# Altium PCB PCB.PcbDoc
Units mm, origin at the board's own origin, x right, y up, seen from the top; angles counter-clockwise.
Board outline 56.2 x 65 mm, 2 copper layers (Top Layer, Bottom Layer); 45 components, 44 nets, 166 pads, 48 vias.
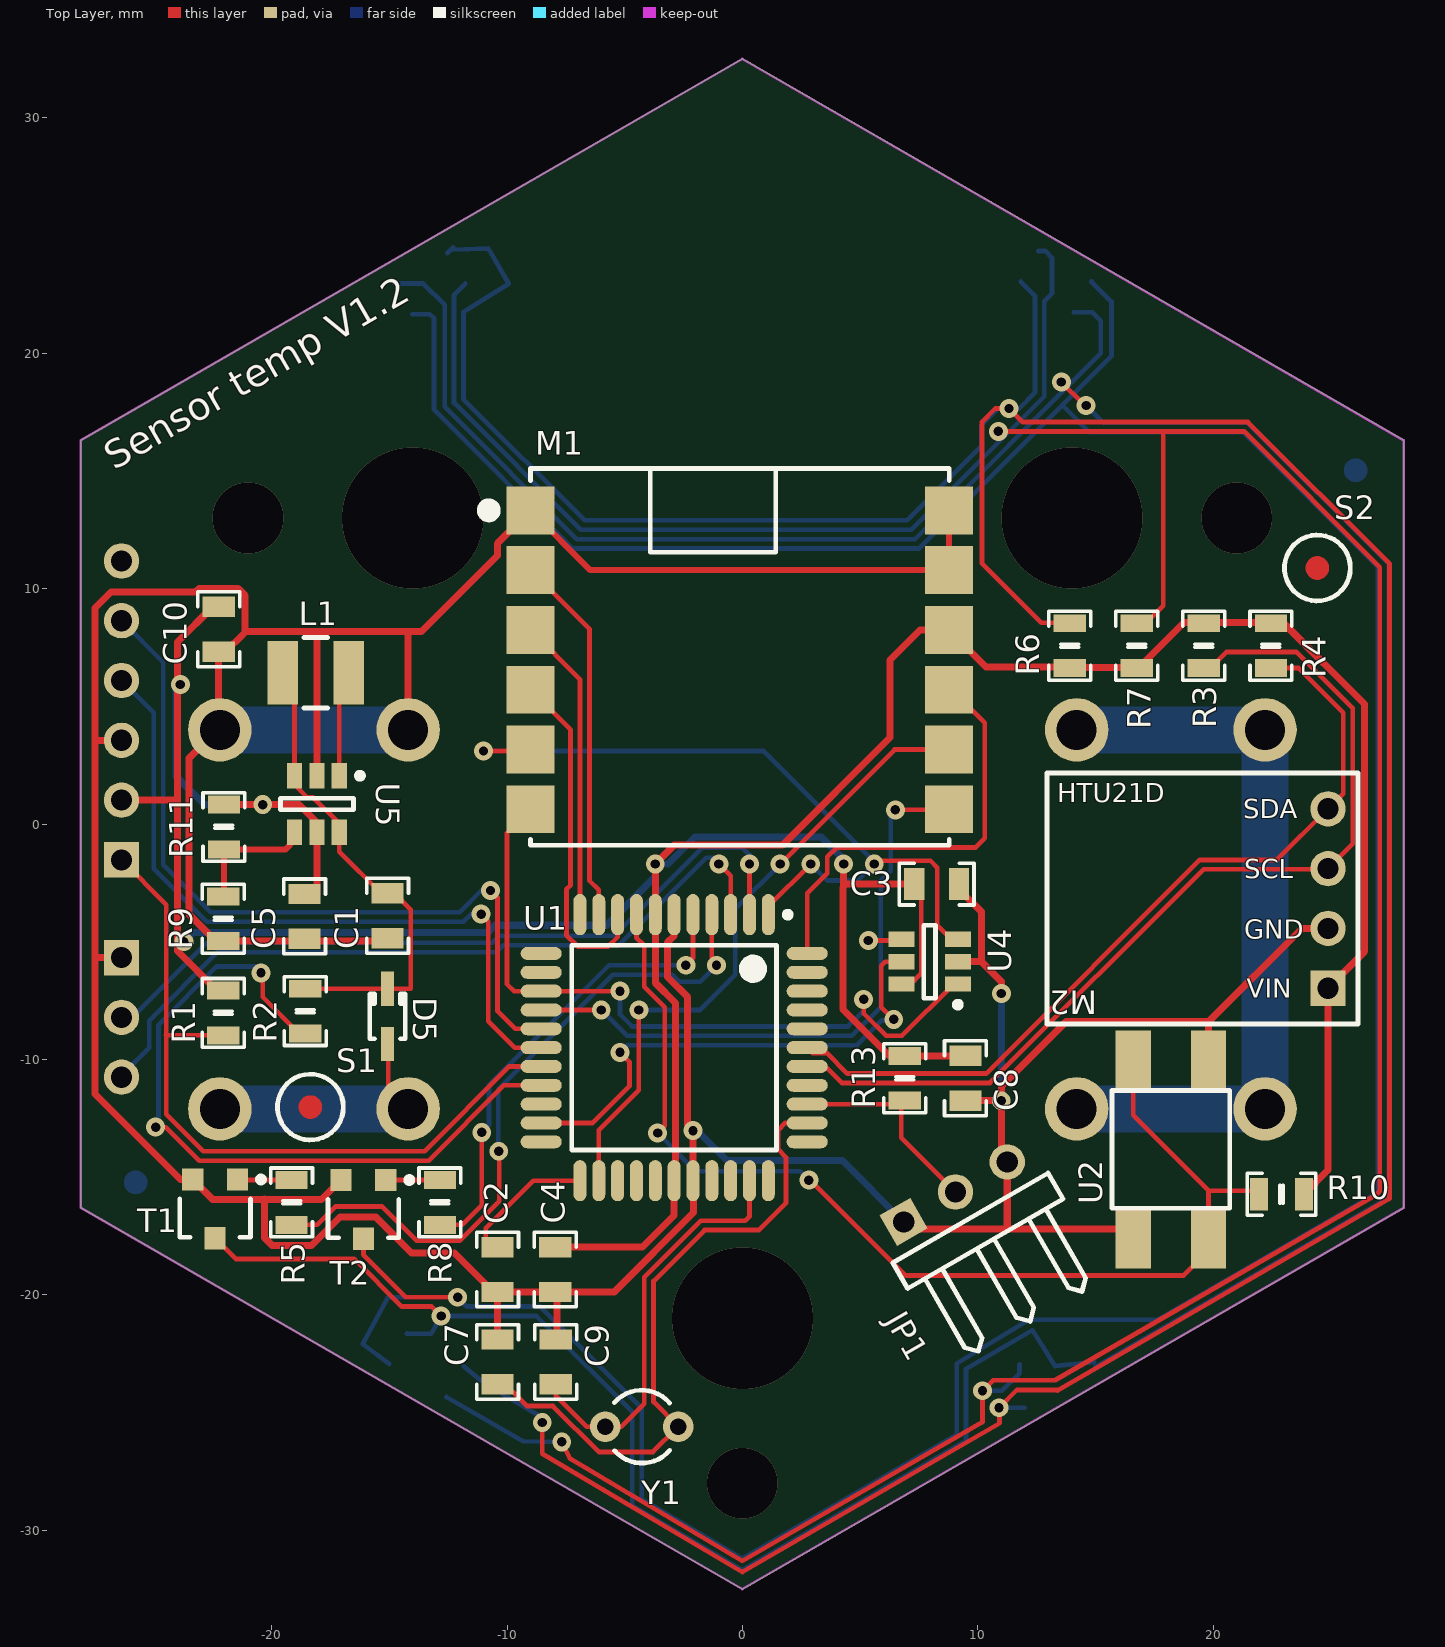
[diagram p0: Top Layer view]
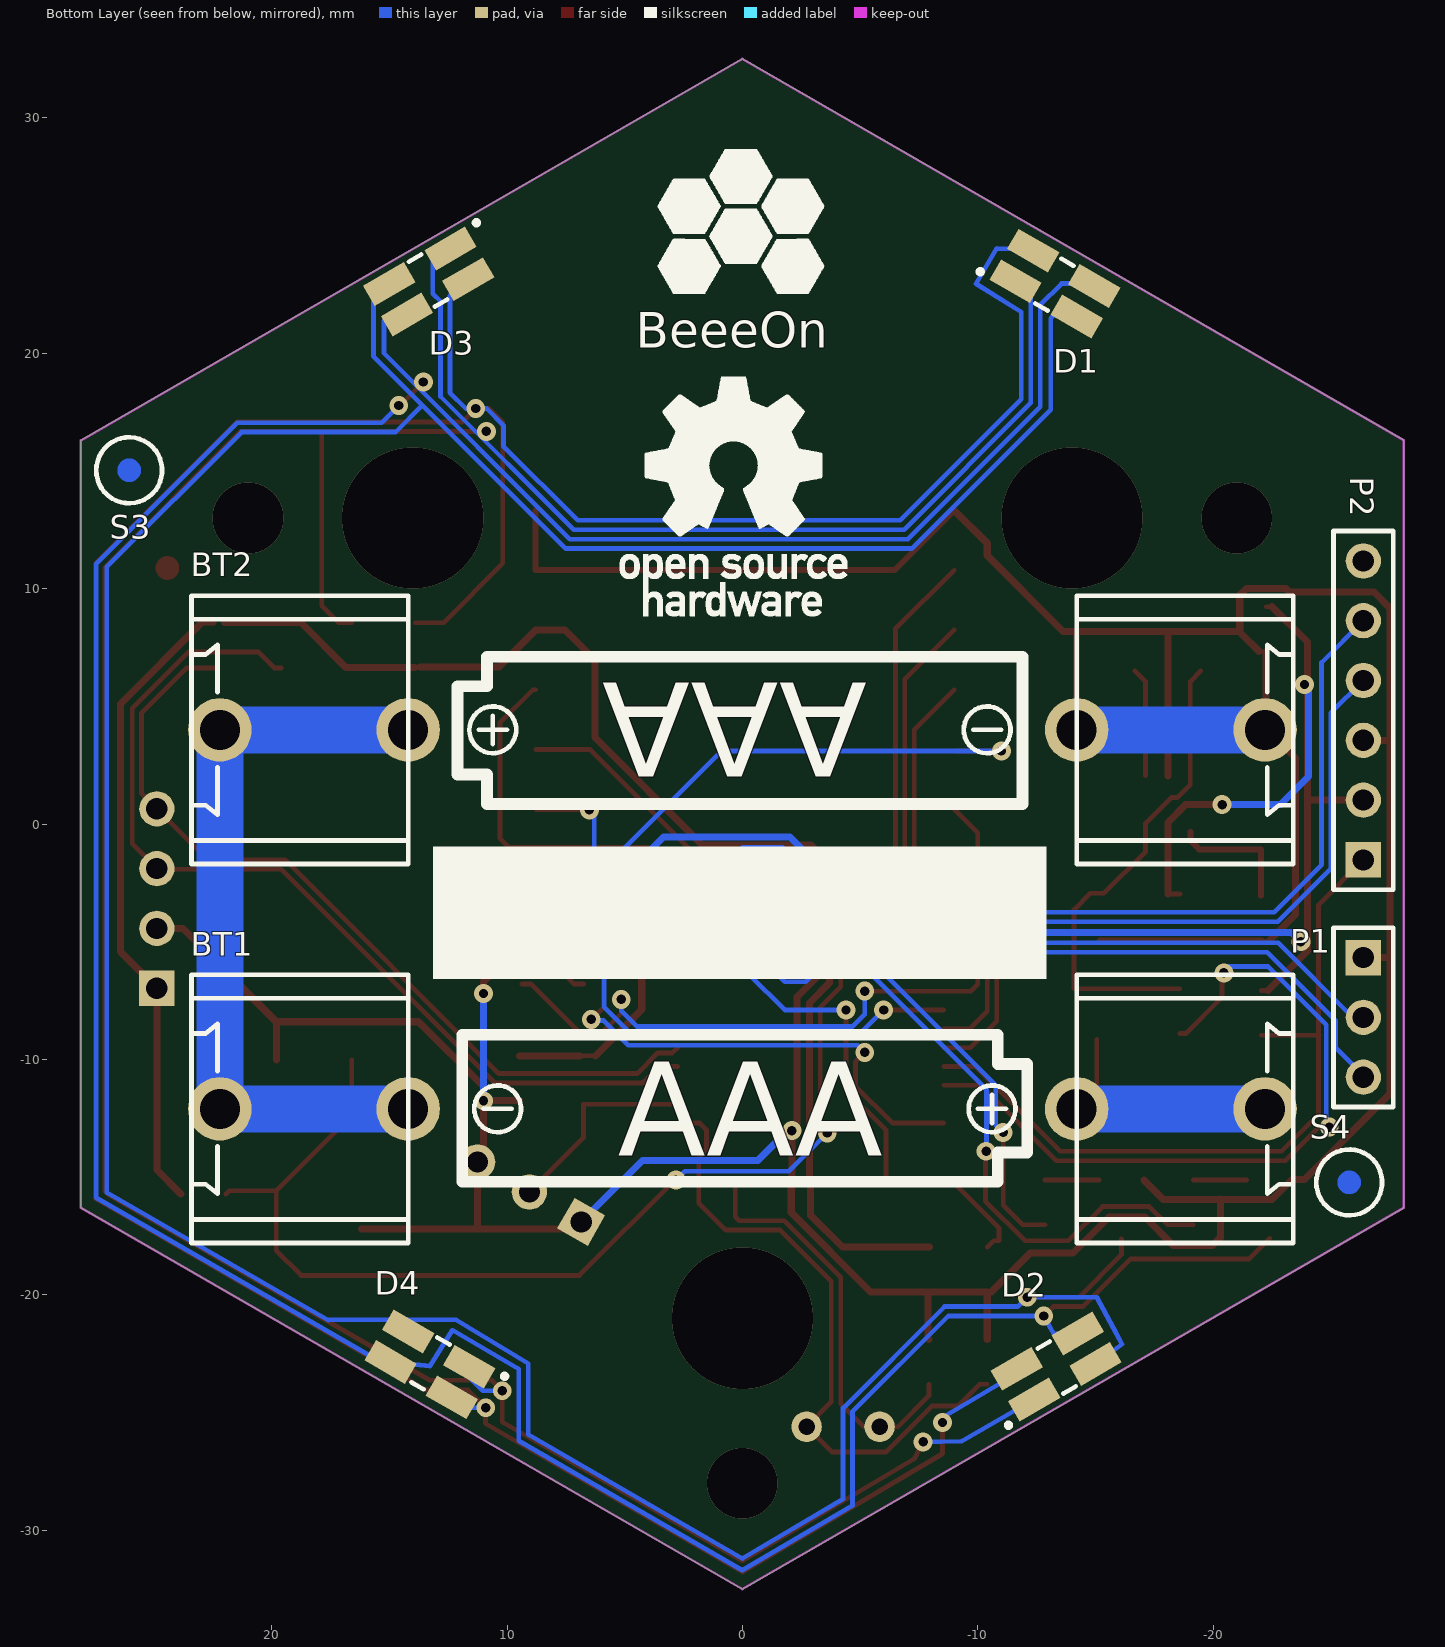
[diagram p1: Bottom Layer view, seen from below]

## Layer stack, top to bottom
Top Layer: signal copper 0.0356
Dielectric: dielectric 0.32, FR-4, Dk 4.8
Bottom Layer: signal copper 0.0356

## Board outline
-28.1,16.3 0,32.5 28.1,16.3 28.1,-16.3 0,-32.5 -28.1,-16.3

## Design rules (kind name [scope] priority, off if disabled: settings)
Clearance [All] p1: gap=0.2
HoleSize [All] p1: absolutevalues=TRUE maxlimit=10 minlimit=0.2 maxpercent=80.000 minpercent=20.000
MinimumSolderMaskSliver [All] p1: minsoldermaskwidth=0.01
PolygonConnect [All] p1: connectstyle=Direct reliefconductorwidth=0.254 reliefentries=4 polygonreliefangle="90 Angle"
RoomDefinition sensor [InComponentClass('sensor')] p1 off: confinementstyle=ConfineIn formatcopy=TRUE lockcomponents=FALSE outline 28.25,25.394 39.453,25.394 39.453,34.325 28.25,34.325
RoutingVias [All] p1: holewidth=0.4 width=0.8 viastyle="Through Hole" minholewidth=0.4 minwidth=0.8 maxholewidth=2 maxwidth=1.5
SilkToSilkClearance [All] p1: silktosilkclearance=0.01
SilkscreenOverComponentPads [All] p1: minsilkscreentomaskgap=0.01
SolderMaskExpansion [All] p1: expansion=0.102
Width [All] p1: maxlimit=2 minlimit=0.2 preferedwidth=0.2
24 further rules are at their usual default settings.

## Components (designator, comment, footprint, x,y, rotation, side; value= is the part's Value field where it differs from the comment)
BT1 "Battery" BATT_HOLDER-AAA 0,-12.1 r180 bottom locked
BT2 "Battery" BATT_HOLDER-AAA 0,4 r0 bottom locked
C1 "100nF" C0805 -15.075,-3.9 r90 top
C2 "10uF" C0805 -10.4,-18.925 r270 top
C3 "100nF" C0805 8.25,-2.55 r180 top
C4 "100nF" C0805 -7.95,-18.925 r270 top
C5 "10uF" C0805 -18.6,-3.925 r270 top
C7 "8pF" C0805 -10.4,-22.85 r90 top
C8 "100nF" C0805 9.475,-10.8 r90 top
C9 "8pF" C0805 -7.925,-22.85 r90 top
C10 "100nF" C0805 -22.25,8.275 r270 top
D1 "LED" "LED MULTI2" -13.3,23 r30 bottom
D2 "LED" "LED MULTI2" -13.3,-23 r330 bottom locked
D3 "LED" "LED MULTI2" 13.3,23 r150 bottom locked
D4 "LED" "LED MULTI2" 13.3,-23 r210 bottom locked
D5 "BAT46" SOD-323 -15.075,-8.175 r90 top
JP1 "EXT" HDR1X3H 6.85,-16.9 r30 top locked
L1 "Inductor" IND3X3 -18.125,6.425 r180 top
M1 "MRF89XAM8A" MRF89XAM8A -9,-0.9 r0 top locked
M2 "HTU21D Module" HTU21D 24.875,-6.975 r180 top locked
P1 "DBG_UART" HDR1X3 -26.375,-5.675 r270 bottom
P2 "ISP PROG" HDR1X6 -26.375,-1.525 r90 bottom
R1 "4k7" R0805 -22.05,-8.025 r90 top
R2 "4k7" R0805 -18.575,-7.95 r270 top
R3 "4k7" R0805 19.6,7.575 r90 top
R4 "4k7" R0805 22.45,7.575 r90 top
R5 "4k7" R0805 -19.15,-16.075 r90 top
R6 "330" R0805 13.9,7.575 r90 top
R7 "330" R0805 16.75,7.575 r90 top
R8 "4k7" R0805 -12.85,-16.075 r90 top
R9 "562k" R0805 -22.05,-4.025 r270 top
R10 "10k" R0805 22.9,-15.725 r180 top
R11 "976k" R0805 -22.025,-0.125 r270 top
R13 "1k" R0805 6.9,-10.8 r270 top
S1 "TARGET" TARGET -18.35,-12.025 r0 top
S2 "TARGET" TARGET 24.425,10.875 r0 top
S3 "TARGET" TARGET 26.05,15.025 r180 bottom
S4 "TARGET" TARGET -25.775,-15.225 r180 bottom
T1 "BC847C" SOT23 -22.4,-16.35 r180 top
T2 "BC847C" SOT23 -16.1,-16.375 r180 top
U1 "PIC18F46J50-I/PT" TQFP-PT44_N -2.9,-9.5 r270 top locked
U2 "Vibra sensor 5x5" "VIBRATION_SENSOR 5X5" 18.2,-13.825 r90 top
U4 "25LC040AT-I/OT" SOT-23-OT6_N 7.95,-5.85 r180 top
U5 "MCP1640" SOT-23-OT6_N -18.075,0.85 r270 top
Y1 "32.768KHz" R38 -4.275,-25.6 r90 top

## Footprints (in the part's own frame and the unit in brackets; to place one, negate y for a bottom-side part, rotate by r counter-clockwise, add the part's x,y. Pads: shape width x height; smd on the part's side, far side on the other; paste and mask are expansions set on the pad)
BATT_HOLDER-AAA [mm] "Contact holder BC-0402 GME 819-134"
  round 2.7 hole 1.7: 1(14.2,0) 1(22.2,0) 2(-22.2,0) 2(-14.2,0)
  silkscreen extent -23.4,-5.7 23.4,5.7
C0805 [mil] "Capacitor SMD 0805; 2.0 x 1.2 mm"
  rect 34x54 smd: 1(-37.5,0) 2(37.5,0)
  silkscreen extent -62,-35 62,35, body extent -39,-24 43,24, height 69
HDR1X3 [mm] "Connector; Header; 3 Position"
  rect 1.5x1.5 hole 0.9: 1(0,0)
  round 1.5 hole 0.9: 2(2.54,0) 3(5.08,0)
  silkscreen extent -1.27,-1.27 6.35,1.27
HDR1X3H [mm] "Connector; Header; 3 Position; Right Angle"
  rect 1.5x1.5 hole 0.9: 1(0,0)
  round 1.5 hole 0.9: 2(2.54,0) 3(5.08,0)
  silkscreen extent -1.27,-6.35 6.35,-1.27
HDR1X6 [mm] "Connector; Header; 6 Position"
  rect 1.5x1.5 hole 0.9: 1(0,0)
  round 1.5 hole 0.9: 2(2.54,0) 3(5.08,0) 4(7.62,0) 5(10.16,0) 6(12.7,0)
  silkscreen extent -1.27,-1.27 13.97,1.27
HTU21D [mm]
  rect 1.5x1.5 hole 0.9: 1(0,0)
  round 1.5 hole 0.9: 2(0,-2.54) 3(0,-5.08) 4(0,-7.62)
  silkscreen extent -1.27,-9.14 11.94,1.52, body extent -1.02,-8.64 1.02,1.02, height 2.5
IND3X3 [mm] "TYS30104R7M-10"
  rect 1.3x2.7 smd: 1(-1.4,0) 2(1.4,0)
  silkscreen extent -0.5,-1.5 0.5,1.5
"LED MULTI2" [mm] "3.0mmx2.5mm SMT LED, 1.4mm thickness."
  rect 2x1 smd: 1(1.5,0.8) 2(-1.5,0.8) 3(1.5,-0.7) 4(-1.5,-0.7)
  silkscreen extent -0.3,-1 3.1,1.3
MRF89XAM8A [mil] "868MHz Ultra-Low Power  Sub-GHz Transceiver Module"
  rect 80x80 smd: 1(0,560) 2(0,460) 3(0,360) 4(0,260) 5(0,160) 6(0,60) 7(700,60) 8(700,160) 9(700,260) 10(700,360) 11(700,460) 12(700,560)
  silkscreen extent -80,0 700,630, body extent 0,0 700,1100, height 5
R38 [mm] "Crystal, Thru-Hole; 2 Leads; Body 3.1 x 8.2 mm (Dia.xH)"
  round 1.3 hole 0.7: 1(0,1.55) 2(0,-1.55)
  silkscreen extent -1.55,-1.19 1.55,1.17
R0805 [mil] "Resistor SMD 0805; 2.0 x 1.2 mm"
  rect 30x54 smd: 1(-37.5,0) 2(37.5,0)
  silkscreen extent -58,-35 58,35, body extent -39,-24 43,24, height 69
SOD-323 [mm] "SOD-323/SC-76; 2 Leads; Body 1.7 x 1.3 mm, (LxW)"
  rect 1.45x0.55 smd: 1(1.175,0) 2(-1.175,0)
  silkscreen extent -0.95,-0.75 0.95,0.75, body extent -0.85,-0.65 0.85,0.65, height 0.9
SOT23 [mm] "SOT23; 3 Leads; Body 3.0 x 1.3 mm"
  rect 0.9x0.95 smd: 1(-0.95,-1.25) 2(0.95,-1.25) 3(0,1.25)
  silkscreen extent -2.08,-1.37 1.5,1.2, body extent -1.5,-0.7 1.5,0.7, height 1.75
SOT-23-OT6_N [mm] "SOT23, 6-Leads, Body 2.9x1.6mm, Pitch 0.95mm, Lead Span 2.7mm, IPC Medium Density"
  rect 1.1x0.65 smd: 1(-1.2,0.95) 2(-1.2,0) 3(-1.2,-0.95) 4(1.2,-0.95) 5(1.2,0) 6(1.2,0.95)
  silkscreen extent -1.33,-1.55 0.25,1.95, body extent -0.9,-1.55 0.9,1.55, height 1.45
TARGET [mm]
  Top Layer circle w0.6: c0,0 r0.2
  silkscreen extent -1.4,-1.4 1.4,1.4
TQFP-PT44_N [mm] "Thin QFP, 44-Leads, Body 10x10mm, Pitch 0.8mm, IPC Medium Density"
  oval 1.75x0.55 smd: 1(-5.65,4) 2(-5.65,3.2) 3(-5.65,2.4) 4(-5.65,1.6) 5(-5.65,0.8) 6(-5.65,0) 7(-5.65,-0.8) 8(-5.65,-1.6) 9(-5.65,-2.4) 10(-5.65,-3.2) 11(-5.65,-4) 23(5.65,-4) 24(5.65,-3.2) 25(5.65,-2.4) 26(5.65,-1.6) 27(5.65,-0.8) 28(5.65,0) 29(5.65,0.8) 30(5.65,1.6) 31(5.65,2.4) 32(5.65,3.2) 33(5.65,4)
  oval 0.55x1.75 smd: 12(-4,-5.65) 13(-3.2,-5.65) 14(-2.4,-5.65) 15(-1.6,-5.65) 16(-0.8,-5.65) 17(0,-5.65) 18(0.8,-5.65) 19(1.6,-5.65) 20(2.4,-5.65) 21(3.2,-5.65) 22(4,-5.65) 34(4,5.65) 35(3.2,5.65) 36(2.4,5.65) 37(1.6,5.65) 38(0.8,5.65) 39(0,5.65) 40(-0.8,5.65) 41(-1.6,5.65) 42(-2.4,5.65) 43(-3.2,5.65) 44(-4,5.65)
  silkscreen extent -5.77,-4.35 4.35,4.95, body extent -5,-5 5,5, height 1.2
"VIBRATION_SENSOR 5X5" [mm] "VIBRATION_SENSOR 5x5"
  rect 2.5x1.5 smd: 1(-3.8,1.6) 2(-3.8,-1.6) 3(3.8,1.6) 4(3.8,-1.6)
  silkscreen extent -2.5,-2.5 2.5,2.5

## Part data
BT1 BT2: "Multicell Battery"
C1 C2 C3 C4 C5 C7 C8 C9 C10: library part Cap, "Capacitor"
D1 D2 D3 D4: library part "LED MULT 2 S"
D5: library part Diode, "Default Diode"
JP1: library part "Header 3H", "Header, 3-Pin, Right Angle"
M1: "868 MHz Ultra-Low Power  Sub-GHz Transceiver Module"
M2: library part HTU21D_MODULE, "Digital Barometric Pressure Sensor Module"
P1: library part "Header 3", "Header, 3-Pin"
P2: library part "Header 6", "Header, 6-Pin"
R1 R2 R3 R4 R5 R6 R7 R8 R9 R10 R11 R13: library part Res2, "Resistor"
T1 T2: library part NPN_BC847C, "NPN General-purpose Transistor"
U1: "Low Power, High Performance USB Microcontroller with nanoWatt XLP Technology, 44-pin TQFP, Industrial Temperature"
U2: library part "Vibra sensor", "Vibration sensor 5x5"
U4: "4K SPI Bus Serial EEPROM, 6-Pin SOT-23, Industrial Temperature, Tape and Reel"
U5: "0.65V Start-up Synchronous Boost Regulator"
Y1: library part XTAL, "Crystal Oscillator"

## Via types
v1: diameter 0.8, hole 0.4, Top Layer to Bottom Layer, tented both sides, 42 vias
v2: diameter 6, hole 6, Top Layer to Bottom Layer, tented both sides, 3 vias
v3: diameter 3, hole 3, Top Layer to Bottom Layer, tented both sides, 3 vias

## Nets (pads, with @x,y where several pads share a name; then routed paths per layer and width w, separated by ;. In a path a pad name is that pad's centre, name@x,y a point inside that pad or via, vN(x,y) a via of type N, cw(c..) or ccw(c..) an arc to the next point about the centre after c; other vN are vias at no path point)
1W-DATA: JP1.2 R13.2 U1.36 | length 8.7
  Top Layer w0.2: U1.36 6.753,-11.9 6.753,-13.333 JP1.2
DHT_EN: U1.30
EE_NCS: U1.21 U4.5 | length 21.6
  Top Layer w0.2: U1.21 -6.366,-12.7 -4.8,-11.134 -4.8,-10.1 v1(-5.2,-9.7) ; v1(6.425,-8.3) 5.9,-7.775 5.9,-6.025 6.075,-5.85 U4.5
  Bottom Layer w0.2: v1(-5.2,-9.7) -4.9,-9.4 4.85,-9.4 5.9,-8.35 v1@6.425,-8.35
GND: BT2.2 C1.1 C2.2 C3.1 C4.2 C5.2 C7.2 C8.1 C9.2 C10.2 JP1.1 JP1.3 M1.1 M1.11 M1.12 M2.2 P1.1 P2.3 R9.2 T1.2 T2.2 U1.6 U1.29 U2.1 U2.4 U4.2 U5.2 | length 217.7
  Top Layer w0.2: R9.2@-22.373,-4.978 R9.2 ; C10.2 C10.2@-21.953,7.322 ; C2.2@-10.573,-19.877 C2.2 ; C4.2 C4.2@-7.875,-19.952 ; U1.29 U1.29@-2.075,-15.125 ; v1@-2.1,-13.35 -1.85,-13.1 -1.925,-13.025 v1(-2.1,-13.025) v1@-1.938,-13.187 ; JP1.1 JP1.1@7.15,-17.2 ; C3.1@9.202,-2.778 C3.1 ; JP1.3@10.997,-14.108 JP1.3
  Top Layer w0.254: M1.1 -6.46,10.784 M1.11 M1.12
  Top Layer w0.3: -27.45,-5.675 P1.1 ; -27.405,3.555 P2.3 ; R9.2@-22.373,-4.978 -23.5,-3.85 -23.5,2.8 -22.25,4.05 C10.2 ; R9.2 C1.1@-15.2,-4.978 ; C10.2@-21.953,7.322 -21.2,8.075 ; -20.3,-15.927 -20.3,-15.95 ; U5.2 -18.075,8.175 ; T2.2 -17.875,-15.95 -20.3,-15.95 ; BT2.2@-14.2,4 -14.2,8.026 ; C2.2@-10.573,-19.877 -12.225,-18.225 -14.05,-18.225 -15.575,-16.7 -17.1,-16.7 -18.3,-17.9 -19.975,-17.9 -20.3,-17.575 -20.3,-15.95 ; C7.2 C2.2 C4.2 -5.445,-19.877 -2.075,-16.507 U1.29@-2.075,-15.125 ; M1.1 -10.4,11.924 -10.4,11.4 -13.625,8.175 -18.075,8.175 ; C9.2 -7.875,-21.848 C4.2@-7.875,-19.952 ; U1.6 -2.9,-4.75 -3.175,-5.025 -3.175,-6.5 -2.325,-7.35 -2.325,-12.8 v1(-2.1,-13.025) ; U1.29 v1@-2.1,-13.35 ; JP1.1@7.15,-17.2 11.249,-17.2 ; U4.2 10.15,-5.85 ; C3.1@9.202,-2.778 10.15,-3.725 10.15,-5.85 ; C8.1 v1(10.997,-11.753) ; JP1.3@10.997,-14.108 v1(10.997,-11.753) ; v1(11,-7.2) 11,-6.7 10.15,-5.85 ; JP1.3 11.249,-17.2 ; U2.1@16.175,-17.2 11.249,-17.2 ; U2.4 19.8,-8.4 ; M2.2 23.765,-4.435 19.8,-8.4 ; -20.3,-15.95 -22.5,-15.95 T1.2 -23.875,-15.1 -27.5,-11.475 -27.5,9.175 -26.825,9.85 -23.24,9.85 -23.081,10.009 -21.419,10.009 -21.125,9.715 -21.125,8.175 -18.075,8.175 ; v1(10.997,-11.753) 10.997,-11.155 13.752,-8.4 19.8,-8.4
  Bottom Layer w0.2: v1(-2.1,-13.025) v1@-1.925,-13.025 ; v1@10.997,-7.203 v1(11,-7.2)
  Bottom Layer w0.3: v1@-1.925,-13.025 -0.65,-14.3 4.25,-14.3 JP1.1 ; v1(10.997,-11.753) v1@10.997,-7.203
  Bottom Layer w2: BT2.2@-22.2,4 BT2.2@-14.2,4
INT0: R10.2 U1.8 U2.2 U2.3 | length 47.9
  Top Layer w0.2: U1.8 -4.5,-4.825 -4.175,-5.15 -4.175,-6.908 -3.3,-7.783 -3.3,-12.826 v1(-3.6,-13.126) ; v1(2.825,-15.125) 2.875,-15.125 6.925,-19.175 18.75,-19.175 19.8,-18.125 U2.2 19.8,-15.575 ; U2.3 16.6,-12.375 19.8,-15.575 ; R10.2 21.797,-15.575 19.8,-15.575
  Bottom Layer w0.2: v1@-3.549,-13.126 v1(-3.6,-13.126) -1.976,-14.75 2.45,-14.75 v1(2.825,-15.125)
LED1: R5.1 U1.4 | length 29.1
  Top Layer w0.2: R5.1 -18.064,-17.027 -17.286,-16.25 -15.3,-16.25 -13.842,-17.708 -12.009,-17.708 -10.325,-16.025 -10.325,-13.925 v1(-10.35,-13.9) ; U1.4 -1.3,-5.8 v1(-1.1,-6)
  Bottom Layer w0.2: v1@-10.367,-13.9 -10.367,-11.266 -5.501,-6.4 -2.99,-6.4 -2.69,-6.7 -2.11,-6.7 -1.8,-6.7 v1(-1.1,-6)
LED2: R8.1 U1.5 | length 20.1
  Top Layer w0.2: R8.1 -11.903,-17.027 -11.076,-16.201 v1(-11.076,-13.099) ; v1(-2.4,-6) -2.1,-5.7 U1.5
  Bottom Layer w0.2: v1(-11.076,-13.099) -10.767,-12.791 -10.767,-11.1 -5.667,-6 v1(-2.4,-6)
LED5: U1.20
LED6: U1.22
MISO1: M1.7 U1.15 U4.4 | length 28.2
  Top Layer w0.2: U1.15 v1(-6,-7.9) ; v1(5.35,-4.95) 6.7,-4.95 U4.4 ; v1(6.5,0.6) M1.7@8.756,0.6
  Bottom Layer w0.2: v1(-6,-7.9) -4.9,-9 4.65,-9 5.875,-7.775 5.875,-4.95 ; v1(5.35,-4.95) 5.875,-4.95 ; v1(6.5,0.6) 6.3,0.4 6.3,-1.99 5.875,-2.415 5.875,-4.95
MOSI1: M1.5 U1.1 U4.3 | length 32.8
  Top Layer w0.2: v1(-11,3.1) M1.5@-9.064,3.1 ; U1.1@1.1,-3.5 v1(2.9,-1.7) ; v1(5.6,-1.7) 5.736,-1.564 7.989,-1.564 8.275,-1.85 8.275,-4.3 8.875,-4.9 U4.3
  Bottom Layer w0.2: v1(-11,3.1) 0.9,3.1 5.6,-1.6 v1(5.6,-1.7) 4.9,-2.4 3.6,-2.4 v1(2.9,-1.7)
MRF_IRQ0: M1.4 U1.9 | length 14.7
  Top Layer w0.2: M1.4 -7.3,4.004 -7.3,-2.6 -7.475,-2.775 -7.475,-4.725 -7,-5.2 -5.7,-5.2 -5.3,-4.8 U1.9
MRF_IRQ1: M1.9 U1.44 | length 18.5
  Top Layer w0.2: U1.44 2.75,-2.95 3.6,-2.1 3.6,-1.4 4,-1 9.9,-1 10.3,-0.6 10.3,4.3 8.896,5.704 M1.9
MRF_NCS: M1.8 U1.24 | length 27.4
  Top Layer w0.2: U1.24 -6.1,-13 -4.4,-11.3 v1(-4.4,-7.9) ; v1(1.6,-1.7) 6.464,3.164 M1.8
  Bottom Layer w0.2: v1(-4.4,-7.9) -1.8,-7.9 -0.3,-6.4 -0.3,-3.6 v1(1.6,-1.7)
MRF_NRESET: M1.2 U1.10 | length 15.8
  Top Layer w0.2: M1.2 -6.5,8.284 -6.5,-2.4 -6.1,-2.8 U1.10
MRF_WAKE: M1.3 U1.11 | length 13
  Top Layer w0.2: M1.3 -6.9,6.144 U1.11
NetBT1_1: BT1.1 D5.2 | length 11.3
  Top Layer w0.2: D5.2@-15.05,-9.15 -15.05,-11.25 BT1.1@-14.2,-12.1
  Bottom Layer w2: BT1.1@-22.2,-12.1 BT1.1@-14.2,-12.1
NetBT1_2: BT1.2 BT2.1 | length 32.1
  Bottom Layer w2: BT1.2@14.2,-12.1 22.2,-12.1 22.2,4 BT2.1@14.2,4
NetC2_1: C2.1 U1.23 | length 6
  Top Layer w0.2: C2.1 -10.672,-17.7 -10.9,-17.7 -10.9,-17.166 -8.884,-15.15 U1.23
NetD1_1: D1.1 D2.1 D3.1 D4.1 R7.2 | length 145
  Top Layer w0.2: v1(-7.675,-26.25) -7.325,-26.95 0,-31.3 10.2,-25.4 v1(10.2,-24.075) 10.632,-23.643 ; 10.644,-23.631 13.279,-23.631 26.925,-15.75 27.075,-15.6 27.075,10.909 21.309,16.675 17.875,16.675 ; v1(10.875,16.675) 17.875,16.675 ; R7.2@16.6,8.553 17.152,8.553 17.875,9.275 17.875,16.675
  Bottom Layer w0.2: D2.1@-12.574,-24.343 -9.3,-26.225 v1(-7.675,-26.25) ; D1.1@-11.774,22.957 -12.25,22.481 -12.25,17.884 -6.866,12.5 7.166,12.5 12.825,18.159 12.825,22.201 13.15,22.526 13.15,24.05 12.857,24.343 D3.1@12.574,24.343 ; v1(10.2,-24.075) 11.025,-24.075 11.774,-23.326 D4.1@11.774,-22.957 ; v1@10.875,16.625 v1(10.875,16.675)
NetD1_2: D1.2 D2.2 D3.2 D4.2 T2.3 | length 149.9
  Top Layer w0.2: T2.3 -16.1,-18.3 -14.3,-20.1 v1(-12.1,-20.1)
  Bottom Layer w0.2: D2.2 -16.125,-22.1 -15.9,-21.675 -15.05,-20.1 v1(-12.1,-20.1) -11.7,-20.5 -8.584,-20.5 -4.275,-24.809 -4.275,-28.675 0,-31.2 9.1,-25.932 9.1,-22.925 12.15,-21.063 17.56,-21.063 ; D1.2@-14.026,21.657 -13.282,21.657 -13.1,21.475 -13.1,17.603 -7.197,11.7 7.497,11.7 15.675,19.878 15.675,22.194 D3.2@14.826,23.043 ; 13.597,17.79 14.737,16.65 21.275,16.65 26.997,10.928 26.997,-15.652 17.573,-21.085
NetD1_3: D1.3 D2.3 D3.3 D4.3 R6.2 | length 150.6
  Top Layer w0.2: v1(-8.5,-25.425) -8.5,-26.75 -0.001,-31.775 10.916,-25.46 v1@10.916,-24.816 ; v1(10.9,-24.8) 11.657,-24.043 13.358,-24.043 ; 13.382,-24.062 27.489,-15.906 27.489,11.061 21.475,17.075 11.9,17.075 v1(11.325,17.65) 10.75,17.65 10.175,17.075 10.175,11.071 12.694,8.553 R6.2@13.9,8.553
  Bottom Layer w0.2: D1.3@-12.524,24.256 D1.3@-12.388,24.393 ; D1.3@-12.354,24.395 D1.3@-12.388,24.393 ; D1.3@-12.28,24.5 D1.3@-12.388,24.393 ; D2.3@-11.824,-23.044 -11.673,-23.17 -10.975,-23.75 -8.575,-25.175 v1(-8.5,-25.425) ; v1(10.9,-24.8) D4.3@11.98,-24.8 ; D3.3@11.824,23.044 12.425,22.443 12.425,18.325 11.75,17.65 v1(11.325,17.65) 10.86,17.65 10.15,16.94 10.15,16.05 7,12.9 -6.7,12.9 -11.85,18.05 -11.85,21.75 -9.925,22.95 -10.725,24.325 -10.8,24.45 -12.352,24.394 D1.3@-12.388,24.393
NetD1_4: D1.4 D2.4 D3.4 D4.4 T1.3 | length 154.5
  Top Layer w0.2: T1.3 -21.525,-18.475 -16.491,-18.475 -14.466,-20.5 -13.2,-20.5 v1(-12.8,-20.9) ; v1(13.551,18.776) 13.551,18.774 14.468,17.857 14.468,17.644 v1(14.601,17.776)
  Bottom Layer w0.2: D1.4@-14.776,22.956 -13.556,22.956 -12.65,22.05 -12.65,17.719 -7.031,12.1 7.331,12.1 15.225,19.994 15.225,21.375 14.856,21.744 D3.4@14.076,21.744 ; D2.4 -13.225,-21.65 -13.15,-21.525 v1(-12.8,-20.9) -8.75,-20.9 -4.675,-24.975 -4.675,-28.95 0,-31.7 9.5,-26.2 9.5,-23.15 12.325,-21.5 13.275,-23.025 D4.4 ; v1(13.551,18.776) v1@13.574,18.776 ; v1(14.601,17.776) 15.327,17.05 21.45,17.05 27.45,11.05 27.45,-15.875 15.05,-23.032 D4.4@14.975,-23.075
NetL1_1: L1.1 U5.1 | length 4.6
  Top Layer w0.2: U5.1 -17.125,6.05 L1.1@-16.675,6.5
NetR2_2: R2.2 U1.19 | length 32.5
  Top Layer w0.2: v1(-24.926,-12.876) -24.49,-12.876 -23.066,-14.3 -13.334,-14.3 -10.134,-11.1 U1.19 ; v1(-20.45,-6.325) -20.45,-6.124 -20.376,-6.05 -20.376,-7.349 -18.822,-8.902 R2.2
  Bottom Layer w0.2: v1(-24.926,-12.876) -24.8,-12.749 -24.8,-8.525 -22.325,-6.05 -20.376,-6.05 -20.45,-6.124 v1(-20.45,-6.325)
NetR5_2: R5.2 T1.1 | length 2.3
  Top Layer w0.2: T1.1@-21.428,-15.122 R5.2
NetR8_2: R8.2 T2.1 | length 2.3
  Top Layer w0.2: T2.1@-15.148,-15.122 R8.2
NetR9_1: R9.1 R11.2 U5.4 | length 5.5
  Top Layer w0.254: R9.1@-22.025,-3.048 R11.2 -19.403,-1.078 -19.025,-0.7 U5.4
PGC: P2.5 U1.16 | length 33.7
  Top Layer w0.2: v1(-10.701,-2.825) -10.4,-3.126 -10.4,-7.95 -9.65,-8.7 U1.16
  Bottom Layer w0.2: P2.5 -24.6,6.86 -24.6,-1.734 -22.584,-3.75 -12.015,-3.75 -11.09,-2.825 v1(-10.701,-2.825) v1@-10.675,-2.8
PGD: P2.4 U1.17 | length 30.9
  Top Layer w0.2: v1(-11.101,-3.825) -10.8,-4.126 -10.8,-8.375 -9.675,-9.5 U1.17
  Bottom Layer w0.2: P2.4 -25,4.72 -25,-1.9 -22.75,-4.15 -11.85,-4.15 -11.525,-3.825 v1(-11.101,-3.825)
RC4: U1.42
RC5: U1.43
RP19: U1.40
RP20: U1.41
SCK1: M1.6 U1.14 U4.1 | length 31.2
  Top Layer w0.2: M1.6 -10,-0.376 -10,-6.8 -9.7,-7.1 U1.14 v1(-5.2,-7.1) ; v1(5.15,-7.45) 5.15,-8.05 6.1,-9 6.775,-9 8.975,-6.8 U4.1 U4.1@9.375,-6.8
  Bottom Layer w0.2: v1(-5.2,-7.1) -5.2,-8.09 -4.69,-8.6 4.484,-8.6 5.15,-7.934 v1(5.15,-7.45)
SCL: M2.3 R3.1 U1.38 | length 41
  Top Layer w0.2: U1.38 3.525,-10.3 4.225,-11 10.516,-11 19.591,-1.925 24.845,-1.925 M2.3 25.925,-0.845 25.925,4.925 23.547,7.303 20.553,7.303 19.873,6.622 R3.1
SDA: M2.4 R4.1 U1.39 | length 35.4
  Top Layer w0.2: U1.39 2.975,-9.725 3.588,-9.725 4.463,-10.6 10.35,-10.6 19.425,-1.525 22.705,-1.525 M2.4 25.525,1.295 25.525,4.725 23.628,6.622 R4.1
T1OSI: C7.1 U1.35 Y1.2 | length 27.5
  Top Layer w0.2: C7.1 -10.073,-23.803 -9.15,-24.725 -8.05,-24.725 -6.1,-26.675 -3.8,-26.675 Y1.2 -3.775,-24.55 -3.775,-19.416 -1.609,-17.25 0.7,-17.25 1.85,-16.1 1.85,-14.15 1.525,-13.825 1.525,-13 1.825,-12.7 U1.35
T1OSO: C9.1 U1.32 Y1.1 | length 17.6
  Top Layer w0.2: C9.1 -7.925,-24.284 -6.609,-25.6 Y1.1 -5.15,-25.6 -4.175,-24.625 -4.175,-19.25 -1.775,-16.85 0.125,-16.85 0.3,-16.675 U1.32
UART_RX: P1.3 U1.3 | length 32.5
  Top Layer w0.2: v1(-1,-1.7) -0.5,-2.2 U1.3
  Bottom Layer w0.2: P1.3@-26.45,-10.755 -25.2,-9.505 -25.2,-8.35 -22.3,-5.45 -10.463,-5.45 -10.163,-5.15 -5.25,-5.15 -1.533,-1.433 -1.267,-1.433 v1(-1,-1.7)
UART_TX: P1.2 U1.2 | length 31.9
  Top Layer w0.2: U1.2 v1(0.3,-1.7)
  Bottom Layer w0.2: P1.2@-25.915,-8.215 -25.915,-8.209 -22.756,-5.05 -10.628,-5.05 -10.328,-4.75 -5.45,-4.75 -1.7,-1 0,-1 0.3,-1.3 v1(0.3,-1.7)
VCC: C3.2 C4.1 C5.1 C8.2 C10.1 M1.10 M2.1 P2.2 R1.2 R3.2 R4.2 R6.1 R7.1 R10.1 R11.1 R13.1 U1.7 U1.28 U4.6 U5.5 | length 168.8
  Top Layer w0.2: v1@-24,5.925 v1(-23.876,5.925) ; v1@-23.95,-5 v1(-23.725,-5) ; C10.1@-22.498,9.227 C10.1 ; R1.2@-22.327,-7.073 R1.2 ; v1@-20.378,0.827 v1(-20.375,0.825) ; C5.1 C5.1@-18.075,-2.973 ; R13.1@6.248,-9.848 R13.1 ; U4.6 7.15,-6.8 7.6,-6.35 7.6,-2.853 C3.2 ; R4.2 R4.2@22.998,8.527
  Top Layer w0.3: P2.2 -24,1.015 ; C10.1@-22.498,9.227 -24,7.725 -24,5.925 -24,1.015 ; R1.2@-22.327,-7.073 -24,-5.4 -24,1.015 ; R11.1 -20.378,0.827 -18.833,0.827 -18.075,0.07 U5.5 C5.1@-18.075,-2.973 ; C4.1 -4.247,-17.972 -2.9,-16.625 U1.28 ; U1.28@-2.85,-15.1 -2.85,-7.596 -3.7,-6.746 U1.7 v1(-3.7,-1.7) -2.9,-0.9 1.7,-0.9 6.267,3.667 6.267,6.967 7.544,8.244 M1.10 10.351,6.673 R6.1@13.7,6.673 ; v1(4.3,-1.7) 4.3,-2.675 4.275,-2.7 4.275,-7.875 R13.1@6.248,-9.848 ; 4.425,-2.55 C3.2 ; R13.1 C8.2 ; R6.1@13.9,6.648 16.847,6.648 18.752,8.553 R4.2@22,8.553 ; R4.2@22.998,8.527 26.425,5.1 26.425,-5.425 M2.1 24.875,-14.703 R10.1
  Bottom Layer w0.2: v1(4.3,-1.7) v1@4.3,-1.5
  Bottom Layer w0.3: v1(-23.876,5.925) -24.05,5.751 -24.05,2.023 -22.852,0.825 v1(-20.375,0.825) ; v1(-23.725,-5) -23.325,-4.6 -10.815,-4.6 -10.515,-4.3 -5.766,-4.3 -3.7,-2.234 v1(-3.7,-1.7) -3.166,-1.7 -2.016,-0.55 3.35,-0.55 v1@4.3,-1.5
VIN: C1.2 D5.1 L1.2 R2.1 U5.3 U5.6 | length 20.7
  Top Layer w0.2: L1.2@-19.475,6.5 -19.025,6.05 U5.3 -19.025,1.675 -18.475,1.125 -18.225,1.125 -17.125,0.025 U5.6 -17.125,-1.175 -15.352,-2.947 C1.2 -14.778,-2.947 -14.089,-3.636 -14.089,-6.997 R2.1
VPP: P2.1 R1.1 U1.18 | length 32.1
  Top Layer w0.2: P2.1 -24.475,-3.425 -24.475,-12.325 -22.9,-13.9 -13.5,-13.9 -9.9,-10.3 U1.18 ; -24.5,-8.978 R1.1
pads on no net: P2.6 U1.12 U1.13 U1.25 U1.26 U1.27 U1.31 U1.33 U1.34 U1.37
copper on no net:
  other v2: 0,-21 -14,13 14,13
  other v3: 0,-28 -21,13 21,13

## Keep-outs
Keep-Out Layer:
  lines w0.1: 28.075,16.3 0,32.5 -28.1,16.3 -28.1,-16.3 0,-32.5 28.1,-16.3 28.1,16.3

## Silkscreen, mask and mechanical layers (free items; w line width, h text height)
Top Overlay:
  text "Sensor temp V1.2" at -26.675,15 h1.2 r30
Bottom Overlay:
  drawing of 4108 lines, arcs and shapes, not listed
  text "BeeeOn" at 4.536,20.221 h1.5
Mechanical 1:
  the board outline again, w0.1
Mechanical 13:
  lines w0.1: -1.27,0 1.27,0 ; 0,-33 0,33.4 ; 28.1,-16.3 -28.1,16.3 0,32.5 28.1,16.3
  lines w0.2: 28.146,-16.25 cw(c0,0) 28.146,16.25

## Dimensions
0,0 to -32.338,-32.338 on Mechanical 13
-14,13 to -22.7,31.8 on Mechanical 13
-21,13 to 0,42 on Mechanical 13
21,13 to 0,42.5 on Mechanical 13
-0.024,39.992 to 13.976,-24.108 on Mechanical 13
-14,-24.1 to 0,33.4 on Mechanical 13
0,-28 to 14.5,-36.5 on Mechanical 13
28.1,16.3 to 28.1,-16.3 on Mechanical 13
1.27,0 to 0,-28 on Mechanical 13
0,-21 to -41.5,0 on Mechanical 13
1.27,0 to 21,13 on Mechanical 13
-28.1,16.3 to 0,32.5 on Mechanical 13

## Text inside footprints (layer, text, board x,y; h text height)
BT1: Bottom Overlay "AAA" at 5.3,-14.1 h4
BT2: Bottom Overlay "AAA" at -5.3,6 h4 r180
M2: Top Overlay "HTU21D" at 13.375,0.925 h0.8; Top Overlay "VIN" at 21.425,-7.375 h0.8; Top Overlay "GND" at 21.325,-4.875 h0.8; Top Overlay "SCL" at 21.325,-2.3 h0.8; Top Overlay "SDA" at 21.275,0.25 h0.8